# Altium PCB PCB1.PcbDoc
Units mil, origin at the board's own origin, x right, y up, seen from the top; angles counter-clockwise.
Board outline 1545 x 2200 mil, 4 copper layers (Top Layer, GND, 3V3, Bottom Layer), stack 23.756 mil thick; 35 components, 23 nets, 128 pads, 360 vias.
Unrouted connection lines stored in the file: 1.
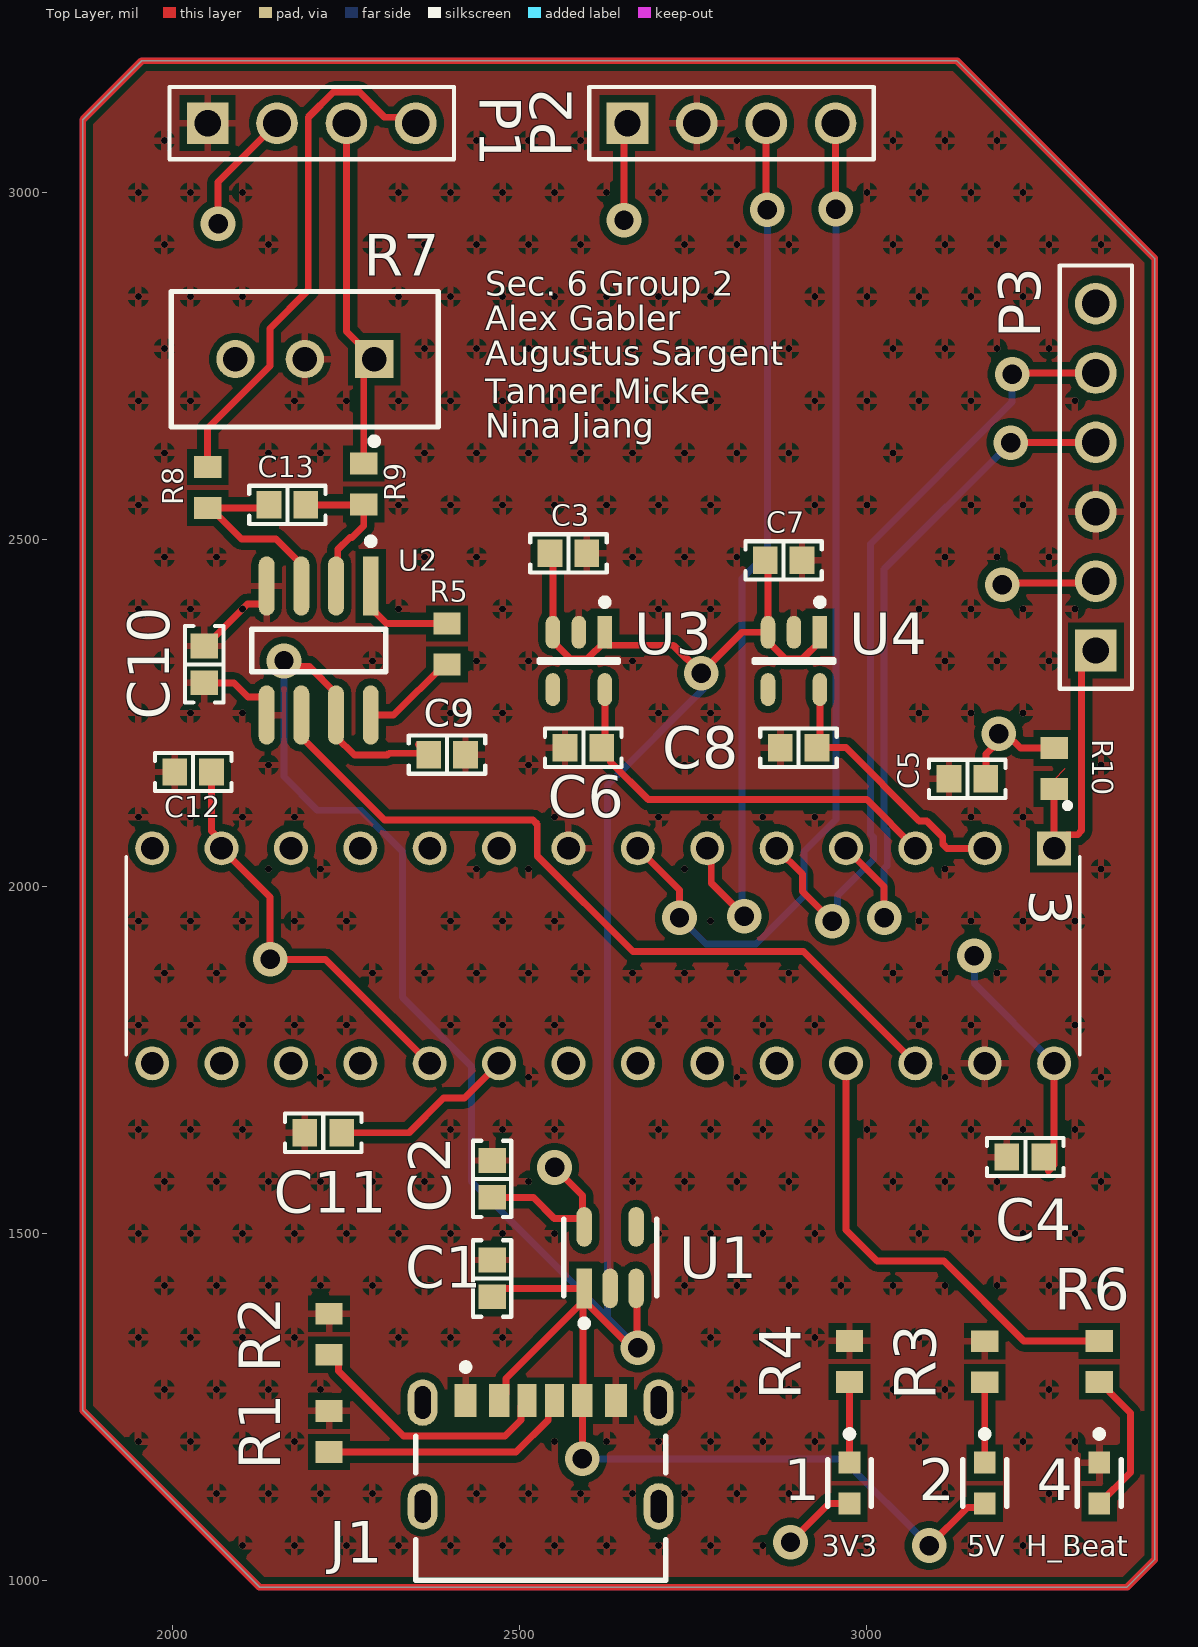
[diagram p0: Top Layer view]
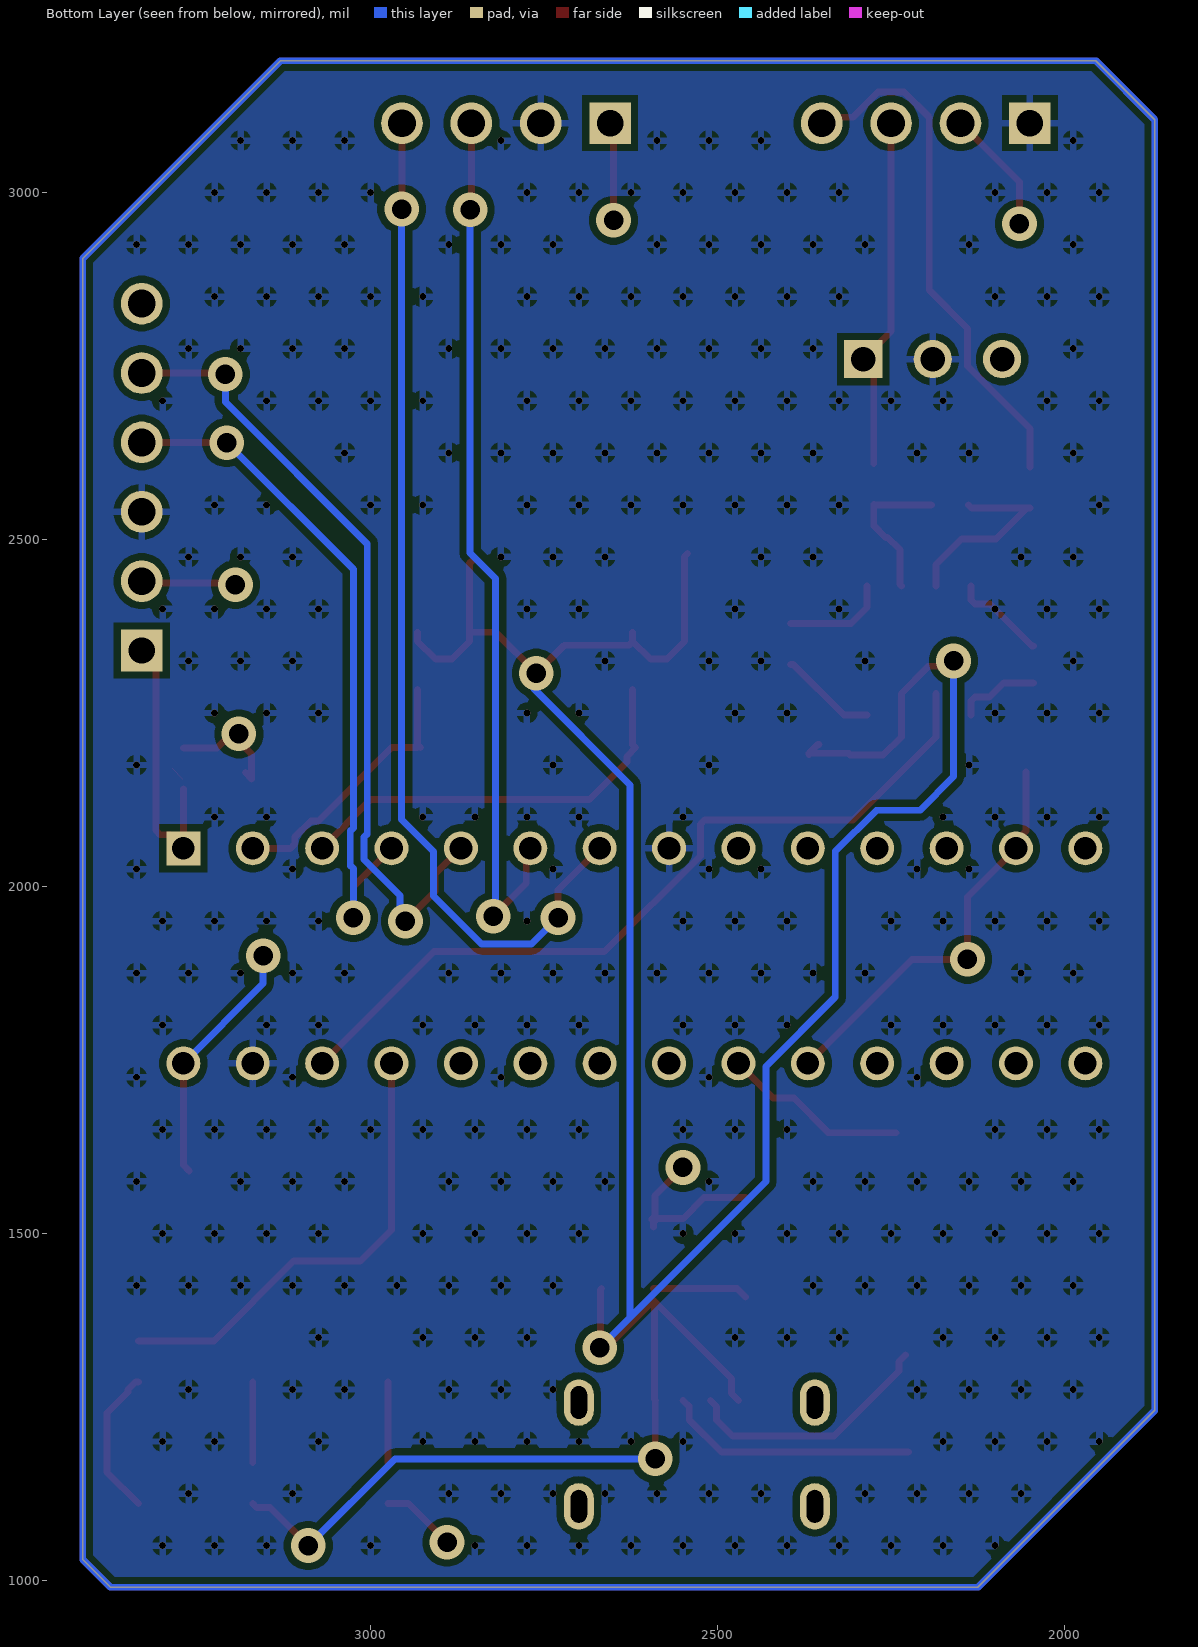
[diagram p1: Bottom Layer view, seen from below]
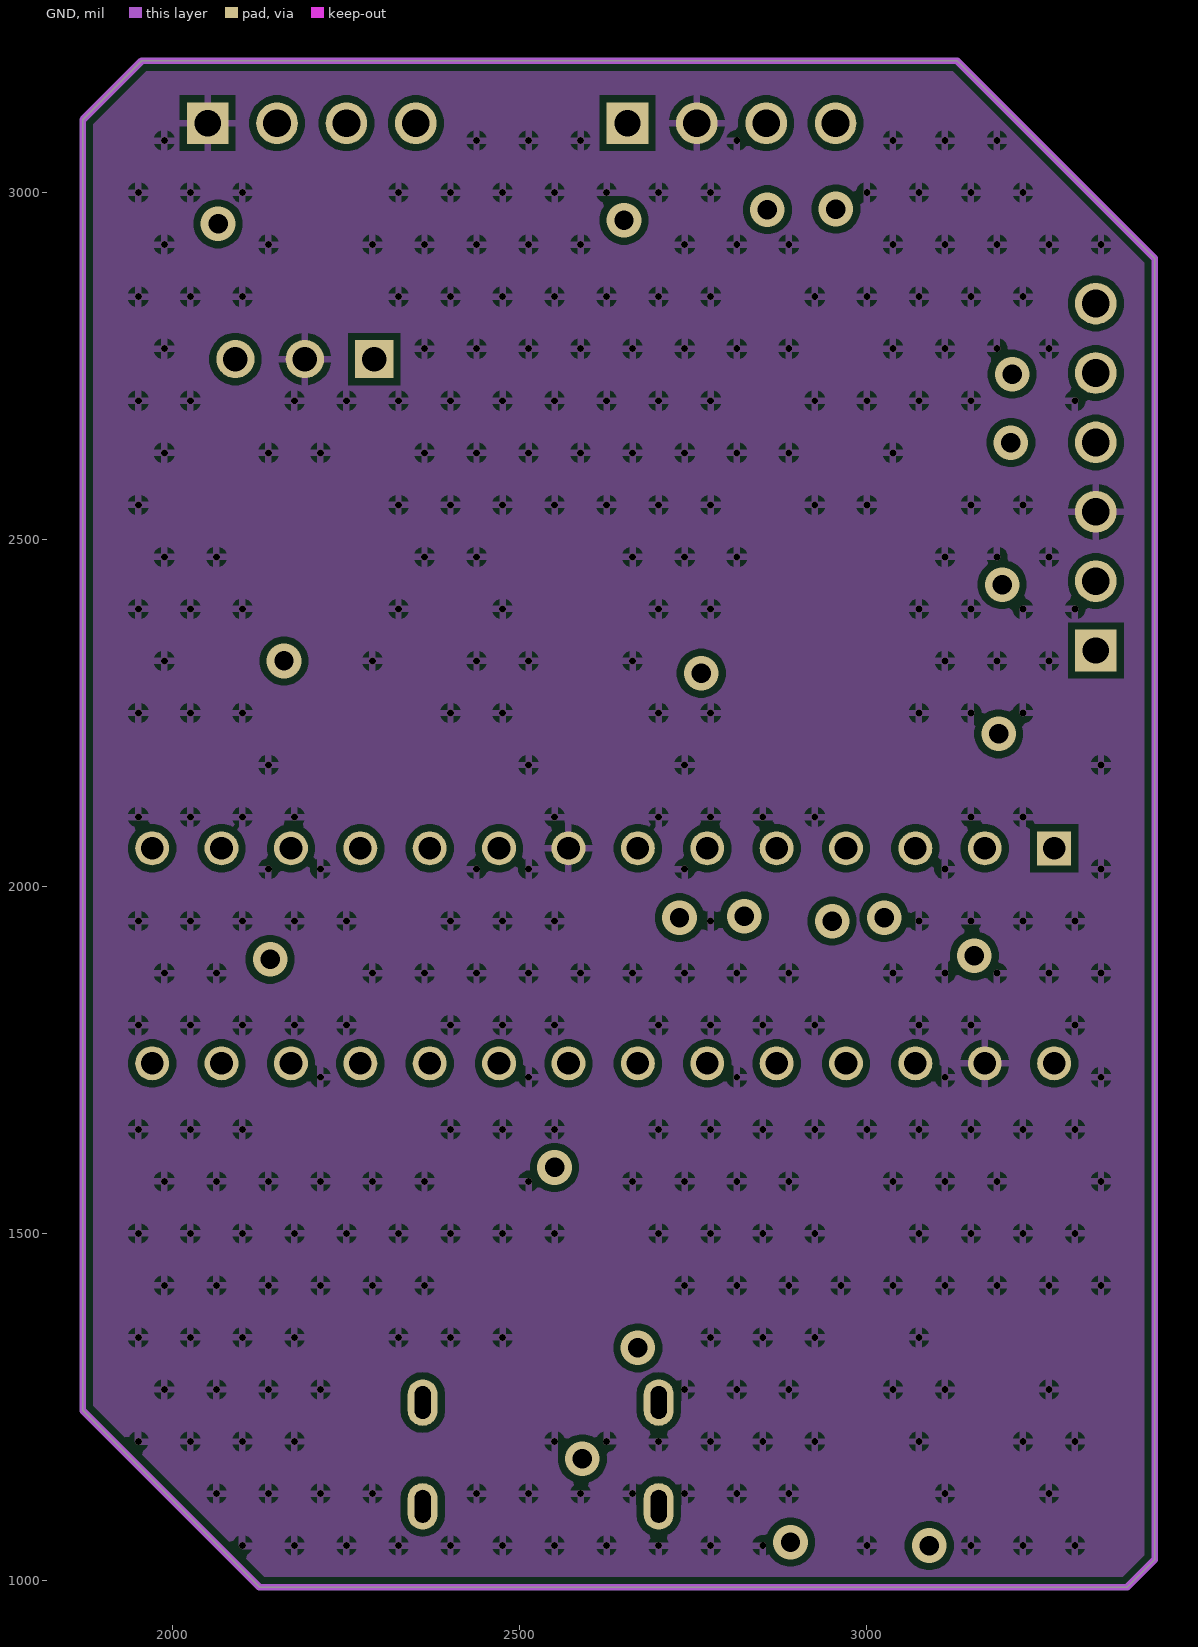
[diagram p2: GND]
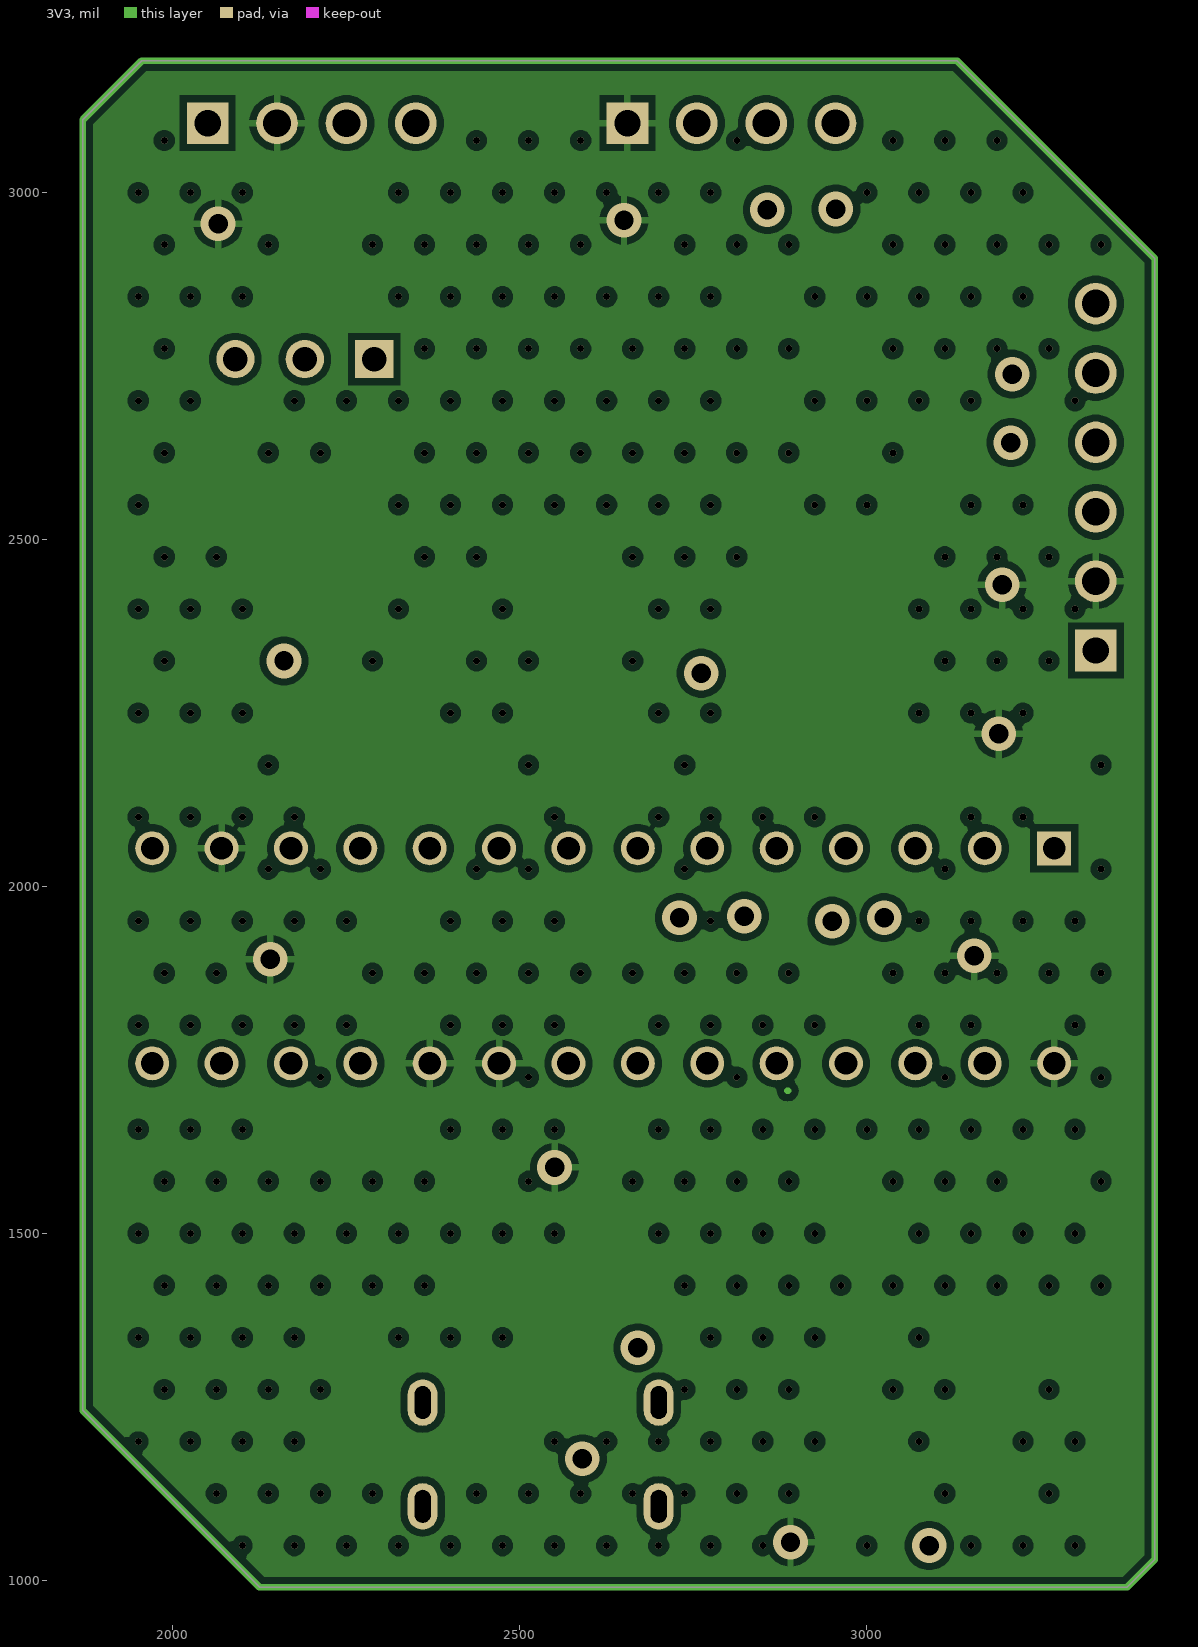
[diagram p3: 3V3]
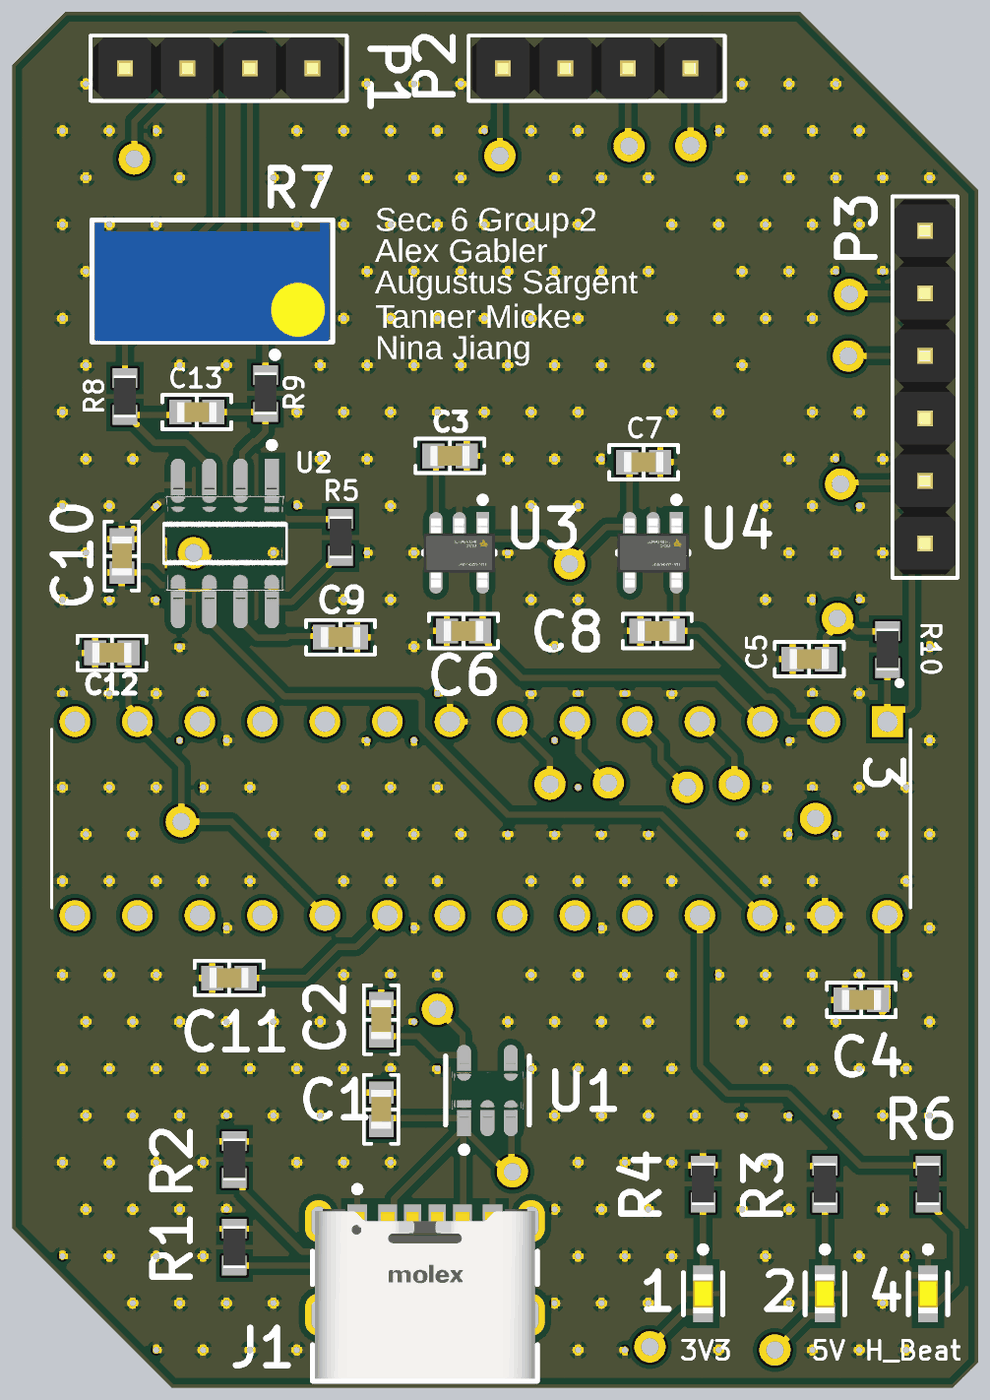
[diagram p4: 3D render of the assembled board from above, using the file's embedded part models]

## Layer stack, top to bottom
Top Solder: solder mask 0.4, Solder Resist, Dk 3.5
Top Layer: signal copper 1.4
Dielectric 2: prepreg 2.8, PP-006, Dk 4.1
GND: signal copper 1.378
Dielectric 1: dielectric 12.6, FR-4, Dk 4.8
3V3: signal copper 1.378
Dielectric 3: prepreg 2.8, PP-006, Dk 4.1
Bottom Layer: signal copper 1.4
Bottom Solder: solder mask 0.4, Solder Resist, Dk 3.5

## Board outline
1870,1245 1870,3105 1955,3190 3130,3190 3415,2905 3415,1030 3375,990 2125,990

## Design rules (kind name [scope] priority, off if disabled: settings)
Clearance "Stitching GND" [IsStitchingVia and InNet('GND') vs (IsVia and (Not IsStitchingVia)) Or IsPad] p1: gap=5 ignorepadtopadclearanceinfootprint=FALSE
Clearance [All] p2: gap=10 ignorepadtopadclearanceinfootprint=FALSE
PolygonConnect [All] p1: connectstyle=Relief reliefconductorwidth=10 reliefentries=4 polygonreliefangle="90 Angle" airgapwidth=10
RoutingVias [All] p1: holewidth=28 width=50 viastyle="Through Hole" minholewidth=28 minwidth=50 maxholewidth=28 maxwidth=50
SolderMaskExpansion [All] p1: expansion=4 istentingtop=FALSE
SupplyNets "Schematic Supply Nets_4" [InNet('1V_Out')] p1: voltage=0.000
SupplyNets "Schematic Supply Nets_3" [InNet('3V3_Out')] p2: voltage=0.000
SupplyNets "Schematic Supply Nets_2" [InNet('5V_Connector')] p3: voltage=0.000
SupplyNets "Schematic Supply Nets_1" [InNet('2V_Out')] p4: voltage=0.000
SupplyNets "Schematic Supply Nets" [InNet('GND')] p5: voltage=0.000
Width [All] p1: maxlimit=10 minlimit=10 preferedwidth=10
30 further rules are at their usual default settings.

## Classes and differential pairs
component class U_Power: 1 2 C1 C2 C3 C6 C7 C8 J1 R1 R2 R3 R4 U1 U3 U4
component class U_Main: 3 4 C4 C5 C9 C10 C11 C12 C13 P1 P2 P3 R5 R6 R7 R8 R9 R10 U2

## Components (designator, comment, footprint, x,y, rotation, side; value= is the part's Value field where it differs from the comment)
1 "GREEN" FP-ASMT-RF45-AN002-MFG 2975,1140 r270 top
2 "GREEN" FP-ASMT-RF45-AN002-MFG 3170,1140 r270 top
3 "PIC24FJ64GA002-I/SP" DIP787W46P254L3467H508Q28 2620,1900 r270 top
4 "GREEN" FP-ASMT-RF45-AN002-MFG 3335,1140 r270 top
C1 "" "CAP 0603_1608" 2460,1435 r90 top value=1u
C2 "" "CAP 0603_1608" 2460,1578.43 r90 top value=1u
C3 "" "CAP 0603_1608" 2570,2480 r0 top value=1u
C4 "" "CAP 0603_1608" 3228.43,1610 r0 top value=1u
C5 "" "CAP 0603_1608" 3145,2155 r0 top value=1u
C6 "" "CAP 0603_1608" 2591.57,2200 r180 top value=1u
C7 "" "CAP 0603_1608" 2880,2470 r0 top value=1u
C8 "" "CAP 0603_1608" 2901.57,2200 r180 top value=1u
C9 "" "CAP 0603_1608" 2395,2190 r180 top value=1u
C10 "" "CAP 0603_1608" 2045,2320 r90 top value=1u
C11 "" "CAP 0603_1608" 2216.57,1645 r0 top value=1u
C12 "" "CAP 0603_1608" 2029.01,2164.92 r0 top value=1u
C13 "" "CAP 0603_1608" 2165,2550 r180 top value=2u2
J1 "217175-0001" FP-217175-0001-MFG 2530,1140 r0 top
P1 "1x4 Header" "1x4 Header" 2050,3100 r0 top
P2 "1x4 Header" "1x4 Header" 2655,3100 r0 top
P3 "1x6 Header" "1x6 Header" 3330,2340 r90 top
R1 "5.1k" RESC1608X55X25ML10T15 2225,1214.53 r90 top value="10 kOhms"
R2 "5.1k" RESC1608X55X25ML10T15 2225,1354.53 r90 top value="10 kOhms"
R3 "510" RESC1608X55X25ML10T15 3170,1315 r90 top value="10 kOhms"
R4 "261" RESC1608X55X25ML10T15 2975,1315.47 r90 top value="10 kOhms"
R5 "510" RESC1608X55X25ML10T15 2395,2349.53 r270 top value="10 kOhms"
R6 "220" RESC1608X55X25ML10T15 3335,1315.47 r270 top value="10 kOhms"
R7 "PV36W501C01B00" FP-PV36W-MFG 2190,2759.8 r90 top
R8 "30k" RESC1608X55X25ML10T15 2050,2575 r90 top value="10 kOhms"
R9 "30k" RESC1608X55X25ML10T15 2275,2580 r90 top value="10 kOhms"
R10 "10k" RESC1608X55X25ML10T15 3270,2170 r90 top value="10 kOhms"
U1 "MIC5504-3.3YM5-TR" FP-SOT23-5LD-PL-1-IPC_B 2630,1465 r90 top
U2 "INA828IDR" FP-D0008A-IPC_B 2210,2340 r270 top
U3 "TLV7743PDBVR" FP-DBV0005A-IPC_C 2585,2325 r270 top
U4 "TLV70220PDBVR" FP-DBV0005A-IPC_C 2895,2325 r270 top

## Footprints (in the part's own frame and the unit in brackets; to place one, negate y for a bottom-side part, rotate by r counter-clockwise, add the part's x,y. Pads: shape width x height; smd on the part's side, far side on the other; paste and mask are expansions set on the pad)
"1x4 Header" [mil]
  rect 60x60 hole 38 mask+0: 1(0,0)
  round 60 hole 40 mask+0: 2(100,0) 3(200,0) 4(300,0)
  silkscreen extent -55,-52 355,52, body extent -50,-49 350,49, height 415
"1x6 Header" [mil]
  rect 60x60 hole 38 mask+0: 1(0,0)
  round 60 hole 40 mask+0: 2(100,0) 3(200,0) 4(300,0) 5(400,0) 6(500,0)
  silkscreen extent -55,-52 555,52, body extent -50,-49 550,49, height 415
"CAP 0603_1608" [mm] "Chip Capacitor, 2-Leads, Body 1.60x0.80mm, IPC Medium Density"
  rect 0.9x1 smd: 1(-0.675,0) 2(0.675,0)
  silkscreen extent -1.4,-0.7 1.4,0.7, body extent -0.8,-0.41 0.8,0.41, height 0.82
DIP787W46P254L3467H508Q28 [mil]
  rect 48.94x48.94 hole 32.68: 1(-155,650)
  round 48.94 hole 32.68: 2(-155,550) 3(-155,450) 4(-155,350) 5(-155,250) 6(-155,150) 7(-155,50) 8(-155,-50) 9(-155,-150) 10(-155,-250) 11(-155,-350) 12(-155,-450) 13(-155,-550) 14(-155,-650) 15(155,-650) 16(155,-550) 17(155,-450) 18(155,-350) 19(155,-250) 20(155,-150) 21(155,-50) 22(155,50) 23(155,150) 24(155,250) 25(155,350) 26(155,450) 27(155,550) 28(155,650)
  silkscreen extent -220,-687 143,687
FP-217175-0001-MFG [mm]
  rrect100% 1.1x1.7 hole 1.2 slot 0.6 at 0 deg paste-2539.97 mask+0: 1(-4.32,2.95) 2(4.32,2.95) 3(-4.32,-0.85) 4(4.32,-0.85)
  rect 0.7x1.2 smd paste+0 mask+0: A5(-0.5,3.03) B5(0.5,3.03)
  rect 0.76x1.2 smd paste+0 mask+0: A9(1.52,3.03) B9(-1.52,3.03)
  rect 0.8x1.2 smd paste+0 mask+0: A12(2.75,3.03) B12(-2.75,3.03)
  silkscreen extent -4.57,-3.55 4.57,4.37, body extent -4.97,-3.65 4.97,3.9, height 0.25
FP-ASMT-RF45-AN002-MFG [mm]
  rect 0.8x0.8 smd paste+0 mask+0: 1(-0.75,0) 2(0.75,0)
  silkscreen extent -1.92,-0.8 0.85,0.8, body extent -1.25,-0.55 1.25,0.55, height 0.25
FP-D0008A-IPC_B [mil]
  rect 85.4x22.92 smd paste+0 mask+0: 1(-93.06,75)
  rrect100% 85.4x22.92 smd paste+0 mask+0: 2(-93.06,25) 3(-93.06,-25) 4(-93.06,-75) 5(93.06,-75) 6(93.06,-25) 7(93.06,25) 8(93.06,75)
  silkscreen extent -162,-97 31,97, body extent -146,-106 146,106, height 10
FP-DBV0005A-IPC_C [mm]
  rect 1.205x0.532 smd paste+0 mask+0: 1(-1.05,0.95)
  rrect100% 1.205x0.532 smd paste+0 mask+0: 2(-1.05,0) 3(-1.05,-0.95) 4(1.05,-0.95) 5(1.05,0.95)
  silkscreen extent -2.28,-1.45 0.05,1.45, body extent -1.75,-1.55 1.75,1.55, height 0.25
FP-PV36W-MFG [mm]
  rect 1.4x1.4 hole 0.9 paste-2539.97 mask+0: 1(0.005,-2.54)
  round 1.4 hole 0.9 paste-2539.97 mask+0: 2(0.005,0) 3(0.005,2.54)
  silkscreen extent -3.12,-4.89 2.48,4.89, body extent -2.58,-4.99 2.58,4.99, height 0.25
FP-SOT23-5LD-PL-1-IPC_B [mm]
  rect 1.456x0.57 smd paste+0 mask+0: 1(-1.125,0.95)
  rrect100% 1.456x0.57 smd paste+0 mask+0: 2(-1.125,0) 3(-1.125,-0.95) 4(1.125,-0.95) 5(1.125,0.95)
  silkscreen extent -2.53,-1.7 1.4,1.7, body extent -2.1,-1.7 2.1,1.7, height 0.25
RESC1608X55X25ML10T15 [mm] "Chip Resistor, 2-Leads, Body 1.70x0.90mm, IPC Low Density"
  rect 0.8x1 smd: 1(-0.75,0) 2(0.75,0)
  body extent -0.85,-0.45 0.85,0.45, height 0.55

## Part data
1 2 4: library part CMP-2000-05796-2, "ASMT-RF45-AN002 LED YLW/GREEN DIFFUSED 0603 SMD", Colour="Yellow Green", Forward Current=20mA, Forward Voltage=2V, manufacturer=Broadcom, Manufacturer Part Number=ASMT-RF45-AN002, Max Junction Temp=+110°C, Power Dissipation=48mW, Reverse Voltage=5V, Temperature="-40°C to +100°C", Temperature Range High=+100°C, Temperature Range Low=-40°C, Automotive=No, Category=Diode, ComponentLink2Description=Datasheet, ComponentLink2URL=https://docs.broadcom.com/docs/AV02-0378EN, Device Class L1=Optoelectronics, Device Class L2=LEDs, Device Class L3=unset, Digikey Description="LED YLW/GREEN DIFFUSED 0603 SMD", Height=0.55mm, Lead Free=Yes, Led Orientation="Top View", Luminous Intensity=60mcd, Mouser Description="LED; SMD; 0603; yellow green; 28-60mcd; 1.6x0.8x0.45mm; 145°; 20mA", Octopart=https://octopart.com/asmt-rf45-an002-broadcom-71127304, Package=ASMT-RF45-AN002, Peak Emmision Wavelength=574nm, RoHS=TRUE, Viewing Angle=145°, Wavelength=573nm
3: library part CMP-031-00017-2, "PIC PICÂ® 24F Microcontroller IC 16-Bit 32MHz 64KB _22K x 24_ FLASH 28-SPDIP", Case/Package="SPDIP-28 Microchip", Availability=Unavailable, Component Type=Standard, Design Item ID=PIC24FJ64GA002-I/SP, MF=Microchip, MP=PIC24FJ64GA002-I/SP, Pins=28, price=None, SnapEDA_Link=https://www.snapeda.com/parts/PIC24FJ64GA002-I/SP/Microchip/view-part/262458/?ref=snap, Source=SnapEDAsch.SchLib
C1 C2 C3 C4 C5 C6 C7 C8 C9 C10 C11 C12 C13: library part CMP-184-001772-1, Capacitance="4.7 µF", Device Package="0603 (1608 Metric)", manufacturer="Murata Electronics", Operating Temperature="-55°C ~ 85°C", Part Number=ZRB18AR6YA475ME05L, Temperature Coefficient=X5R, Tolerance=±20%, Voltage - Rated=35V, Applications="Acoustic Noise Reduction", ComponentLink1Description=Datasheet, ComponentLink1URL=https://search.murata.co.jp/Ceramy/image/img/A01X/G101/ENG/ZRB18AR6YA475ME05-01.pdf, ComponentLink2Description="DigiKey Link", ComponentLink2URL=https://www.digikey.com/en/products/detail/murata-electronics/ZRB18AR6YA475ME05L/7595507, Features="Interposer Termination", lastupdated="9/19/2022 1:00:59 PM", Lifecycle Status=Active, Minimum Order=1, Mounting Type="Surface Mount, MLCC", Package / Case="0603 (1608 Metric)", packaging=TapeAndReel, Part Status=Active, partid=9721, price=0.10, series=ZRB, Size / Dimension="0.063\" L x 0.031\" W (1.60mm x 0.80mm)", Thickness (Max)="0.047\" (1.20mm)"
J1: library part CMP-002-00112-1, "Conn USB 2.0 Type C F 6 POS 1.23mm/1.02mm/1mm Solder RA SMD 6 Terminal 1 Port"
P1 P2: library part CMP-006-000008-2, "Male Header, Dupont, 1x4", Design Item ID="1x4 Header", Source="1x4 Header.SchLib"
P3: library part CMP-010-000000-2, "Male Header, Dupont, 1x6", Design Item ID="1x6 Header", Source="1x6 Header.SchLib"
R1 R2 R3 R4 R5 R6 R8 R9 R10: library part CMP-009-00014-4, "Chip Resistor, +/-1%, 0.1 W, -55 to 155 degC, 0603 (1608 Metric)", Case/Package=0603, Max Operating Temperature=155°C, Min Operating Temperature=-55°C, Power=100mW, Tolerance=1%, Voltage Rating=50V, Mounting Technology=SM, Pins=2, RoHS Compliant=True
R7: library part CMP-009-00201-1, "Trimmer", RoHS Compliant=Yes
U1: library part CMP-008-00006-1, "Fixed Positive LDO Regulator, 3.3V, 0.38V Dropout, CMOS, PDSO5", RoHS Compliant=Yes
U2: library part CMP-00026-1, "Instrumentation Amplifier, 1 Func, 90uV Offset-Max, 2MHz Band Width, PDSO8"
U3 U4: library part CMP-019-00061-1, "Fixed Positive LDO Regulator, 2V, CMOS, PDSO5", Case/Package=LSSOP, Max Supply Voltage=5.5V, Pins=5, RoHS Compliant=Yes

## Via types
v1: diameter 10, hole 10, Top Layer to Bottom Layer, 339 vias
v2: diameter 50, hole 28, Top Layer to Bottom Layer, 21 vias

## Nets (pads, with @x,y where several pads share a name; then routed paths per layer and width w, separated by ;. In a path a pad name is that pad's centre, name@x,y a point inside that pad or via, vN(x,y) a via of type N, cw(c..) or ccw(c..) an arc to the next point about the centre after c; other vN are vias at no path point)
1V_Out: 3.3 C6.1 U3.5 | length 602.1
  Top Layer w10: U3.5 2622.4,2204.25 C6.1 2630.87,2187.28 2630.87,2179.13 2685,2125 3000,2125 3.3
2V_Out: 3.2 C8.1 U4.5 | length 389.2
  Top Layer w10: C8.1 2932.4,2204.25 U4.5 ; C8.1@2932.4,2200 2970,2200 3075.53,2094.47 3086.35,2094.47 3109.47,2071.35 3109.47,2060.86 3115.33,2055 3.2
3V3_Out: 1.2 3.13 3.19 3.20 3.28 C2.1 C4.2 C5.2 C11.2 C12.2 P1.2 P2.1 P3.2 R10.2 U1.5 | length 2221.6
  Top Layer w10: C12.2 2055.58,2079.95 2070,2065.54 3.13 2140,1985 v2(2140,1895) 2220,1895 3.19 3.19@2370,1739.67 ; v2(2065,2955) 2065,3015 P1.2 ; C11.2 2340,1645 2390,1695 2420,1695 3.20 ; C2.1 2519.4,1551.85 2549.51,1521.74 2586.86,1521.74 2592.6,1516 U1.5 ; v2(2550,1595) 2590.22,1554.78 2590.22,1524.76 U1.5@2594.98,1520 ; v2(2650,2960) 2650,3095 P2.1 ; v2(2890,1055) 2945.47,1110.47 1.2 ; C5.2@3180.63,2164.06 C5.2 3171.57,2190.75 3190,2209.18 v2(3190,2220) 3200.82,2220 3221.3,2199.53 R10.2 ; v2(3195,2435) 3197.5,2437.5 3327.5,2437.5 P3.2 ; 3261.57,1590 3270,1598.43 3.28
  3V3 w10: 2885.53,1705.53 2886.35,1705.53
  Bottom Layer w10: v2(3155,1900) 3155,1860 3.28
5V_Connector: 2.2 C1.1 C3.1 C7.1 C9.2 J1.A9 J1.B9 U1.1 U1.3 U2.7 U3.1 U3.3 U4.1 U4.3 | length 4701.2
  Top Layer w10: v2(2160,2325) 2167.65,2317.35 2195.84,2317.35 2235,2278.19 U2.7 2235,2215.7 2261.46,2189.24 2308.97,2189.24 2311.69,2191.97 C9.2@2368.43,2191.97 ; C9.2@2353.74,2204.69 2355.71,2204.69 C9.2@2368.43,2191.97 ; C9.2 C9.2@2368.43,2191.97 ; C1.1 2472.27,1420.7 U1.1 ; J1.B9 2480.12,1269.25 2480.12,1290.78 2591.22,1401.88 2591.22,1260.67 J1.A9 2589.92,1259.21 2589.92,1175.08 v2(2590,1175) ; C3.1 2547.6,2475.83 U3.3 2547.6,2353.11 2573.07,2327.63 2596.93,2327.63 U3.1@2622.4,2353.11 ; U1.1@2592.6,1403.26 2660.86,1335 v2(2670,1335) 2668.7,1336.3 2668.7,1419.4 U1.3 ; U3.1 U3.1@2622.4,2353.11 ; C7.1 2857.6,2465.83 U4.3 ; U4.1 2932.4,2353.11 2906.93,2327.63 2883.07,2327.63 2857.6,2353.11 U4.3 ; v2(3090,1050) 3145.11,1105.11 3164.64,1105.11 2.2 ; U3.1@2622.4,2353.11 2627.88,2347.63 2721.04,2347.63 v2(2761.36,2307.31) 2820.41,2366.36 U4.3
  Bottom Layer w10: v2(2160,2325) 2160,2158.26 2208.49,2109.77 2271.04,2109.77 2330.53,2050.29 2330.53,1840.29 2430.53,1740.29 2430.53,1574.47 2626.38,1378.62 ; v2(2590,1175) 2965,1175 v2(3090,1050) ; v2(2670,1335) 2626.38,1378.62 ; v2(2761.36,2307.31) 2761.36,2288.64 2765,2285 2626.38,2146.38 2626.38,1378.62
GND: 3.8 3.27 4.1 C1.2 C2.2 C3.2 C4.1 C5.1 C6.2 C7.2 C8.2 C9.1 C10.1 C10.2 C11.1 C12.1 J1.A12 J1.B12 P1.1 P2.2 P3.3 R1.2 R2.2 R3.2 R4.2 R7.2 U1.2 U2.4 U2.5 U3.2 U4.2 | length 258.8
  Top Layer w10: C10.1 2087.97,2293.43 2108.21,2273.19 2129.03,2273.19 2135,2267.22 U2.5 ; C10.2 2046.97,2346.57 2107.21,2406.81 2129.03,2406.81 2135,2412.78 U2.4
  other v1: 2100,1050 2175,1050 2250,1050 2325,1050 2400,1050 2475,1050 2550,1050 2625,1050 2700,1050 2775,1050 2850,1050 3000,1050 3150,1050 3225,1050 3300,1050 2062.5,1125 2137.5,1125 2212.5,1125 2287.5,1125 2437.5,1125 2512.5,1125 2587.5,1125 2662.5,1125 2737.5,1125 2812.5,1125 2887.5,1125 3112.5,1125 3262.5,1125 1950,1200 2025,1200 2100,1200 2175,1200 2550,1200 2625,1200 2700,1200 2775,1200 2850,1200 2925,1200 3075,1200 3225,1200 3300,1200 1987.5,1275 2062.5,1275 2137.5,1275 2212.5,1275 2737.5,1275 2812.5,1275 2887.5,1275 3037.5,1275 3112.5,1275 3262.5,1275 1950,1350 2025,1350 2100,1350 2175,1350 2325,1350 2400,1350 2475,1350 2775,1350 2850,1350 2925,1350 3075,1350 1987.5,1425 2062.5,1425 2137.5,1425 2212.5,1425 2287.5,1425 2362.5,1425 2737.5,1425 2812.5,1425 2887.5,1425 2962.5,1425 3037.5,1425 3112.5,1425 3187.5,1425 3262.5,1425 3337.5,1425 1950,1500 2025,1500 2100,1500 2175,1500 2250,1500 2325,1500 2400,1500 2475,1500 2550,1500 2700,1500 2775,1500 2850,1500 2925,1500 3075,1500 3150,1500 3225,1500 3300,1500 1987.5,1575 2062.5,1575 2137.5,1575 2212.5,1575 2287.5,1575 2362.5,1575 2512.5,1575 2662.5,1575 2737.5,1575 2812.5,1575 2887.5,1575 3037.5,1575 3112.5,1575 3187.5,1575 3337.5,1575 1950,1650 2025,1650 2100,1650 2400,1650 2475,1650 2550,1650 2700,1650 2775,1650 2850,1650 2925,1650 3000,1650 3075,1650 3150,1650 3225,1650 3300,1650 2212.5,1725 2512.5,1725 2812.5,1725 3112.5,1725 3337.5,1725 1950,1800 2025,1800 2100,1800 2175,1800 2250,1800 2400,1800 2475,1800 2550,1800 2700,1800 2775,1800 2850,1800 2925,1800 3075,1800 3150,1800 3300,1800 1987.5,1875 2062.5,1875 2287.5,1875 2362.5,1875 2437.5,1875 2512.5,1875 2587.5,1875 2662.5,1875 2737.5,1875 2812.5,1875 2887.5,1875 3037.5,1875 3112.5,1875 3187.5,1875 3262.5,1875 3337.5,1875 1950,1950 2025,1950 2100,1950 2175,1950 2250,1950 2400,1950 2475,1950 2550,1950 2775,1950 3075,1950 3150,1950 3225,1950 3300,1950 2137.5,2025 2212.5,2025 2437.5,2025 2512.5,2025 2737.5,2025 3112.5,2025 3337.5,2025 1950,2100 2025,2100 2100,2100 2175,2100 2550,2100 2700,2100 2775,2100 2850,2100 2925,2100 3150,2100 3225,2100 2137.5,2175 2512.5,2175 2737.5,2175 3337.5,2175 1950,2250 2025,2250 2100,2250 2400,2250 2475,2250 2700,2250 2775,2250 3075,2250 3150,2250 3225,2250 1987.5,2325 2287.5,2325 2437.5,2325 2512.5,2325 2662.5,2325 3112.5,2325 3187.5,2325 3262.5,2325 1950,2400 2025,2400 2100,2400 2325,2400 2475,2400 2700,2400 2775,2400 3075,2400 3150,2400 3225,2400 3300,2400 1987.5,2475 2062.5,2475 2362.5,2475 2437.5,2475 2662.5,2475 2737.5,2475 2812.5,2475 3112.5,2475 3187.5,2475 3262.5,2475 1950,2550 2325,2550 2400,2550 2475,2550 2550,2550 2625,2550 2700,2550 2775,2550 2925,2550 3000,2550 3150,2550 3225,2550 1987.5,2625 2137.5,2625 2212.5,2625 2362.5,2625 2437.5,2625 2512.5,2625 2587.5,2625 2662.5,2625 2737.5,2625 2812.5,2625 2887.5,2625 3037.5,2625 1950,2700 2025,2700 2175,2700 2250,2700 2325,2700 2400,2700 2475,2700 2550,2700 2625,2700 2700,2700 2775,2700 2925,2700 3000,2700 3075,2700 3150,2700 3300,2700 1987.5,2775 2362.5,2775 2437.5,2775 2512.5,2775 2587.5,2775 2662.5,2775 2737.5,2775 2812.5,2775 2887.5,2775 3037.5,2775 3112.5,2775 3187.5,2775 3262.5,2775 1950,2850 2025,2850 2100,2850 2325,2850 2400,2850 2475,2850 2550,2850 2625,2850 2700,2850 2775,2850 2925,2850 3000,2850 3075,2850 3150,2850 3225,2850 1987.5,2925 2137.5,2925 2287.5,2925 2362.5,2925 2437.5,2925 2512.5,2925 2587.5,2925 2737.5,2925 2812.5,2925 2887.5,2925 3037.5,2925 3112.5,2925 3187.5,2925 3262.5,2925 3337.5,2925 1950,3000 2025,3000 2100,3000 2325,3000 2400,3000 2475,3000 2550,3000 2625,3000 2700,3000 2775,3000 3000,3000 3075,3000 3150,3000 3225,3000 1987.5,3075 2437.5,3075 2512.5,3075 2587.5,3075 2812.5,3075 3037.5,3075 3112.5,3075 3187.5,3075
Net1_1: 1.1 R4.1 | length 116.4
  Top Layer w10: 1.1 R4.1
Net2_1: 2.1 R3.1 | length 115.9
  Top Layer w10: 2.1 R3.1
Net3_1: 3.1 P3.1 R10.1 | length 426.3
  Top Layer w0: R10.1@3270,2153.94 3286.06,2170
  Top Layer w10: R10.1 3.1 3289.47,2074.47 3303.61,2074.47 3309.47,2080.33 3309.47,2319.47 P3.1
Net3_4: 3.4 P3.4 | length 1009.4
  Top Layer w10: 3.4 3025,2000 v2(3025,1955) ; v2(3207.53,2639.68) 3207.85,2640 P3.4
  Bottom Layer w10: v2(3025,1955) 3025,2025.9 3029.47,2030.37 3029.47,2079.63 3025,2084.1 3025,2457.15 v2(3207.53,2639.68)
Net3_5: 3.5 P3.5 | length 1158.8
  Top Layer w10: 3.5 2907.19,2017.81 2907.19,1992.81 v2(2950,1950) ; v2(3209.49,2738.28) 3211.22,2740 P3.5
  Bottom Layer w10: v2(2950,1950) 2957.65,1957.65 2957.65,1986.84 3009.47,2038.65 3009.47,2071.35 3005,2075.82 3005,2493.72 3209.49,2698.21 v2(3209.49,2738.28)
Net3_6: 3.6 P2.3 | length 1280.8
  Top Layer w10: 3.6 2775.8,2049.2 2775.8,2004.71 v2(2823.49,1957.01) ; P2.3 2855,2977.04 v2(2856.69,2975.35)
  Bottom Layer w10: v2(2823.49,1957.01) 2822.99,1957.01 2820,1960 2820,2443.92 2856.69,2480.61 v2(2856.69,2975.35)
Net3_7: 3.7 P2.4 | length 1481.6
  Top Layer w10: 3.7 2730,1995 v2(2730,1955) ; P2.4 2955,2976.63 v2(2955.38,2976.25)
  Bottom Layer w10: v2(2730,1955) 2767.99,1917.01 2840.06,1917.01 2909.47,1986.42 2909.47,2050.29 2955.38,2096.2 v2(2955.38,2976.25)
Net3_25: 3.25 R6.1 | length 671.3
  Top Layer w10: 3.25 2970,1505 3015,1460 3111.17,1460 3226.17,1345 R6.1
Net3_26: 3.26 U2.6 | length 1169.1
  Top Layer w10: U2.6@2185,2278.19 U2.6 2185,2215.7 2305.17,2095.53 2519.14,2095.53 2525,2089.67 2525,2044.18 2663.1,1906.08 2908.92,1906.08 3.26
Net4_2: 4.2 R6.2 | length 215.1
  Top Layer w10: 4.2 3380,1155.47 3380,1240.94 3349.69,1271.26 3349.69,1275.2 3338.94,1285.94 R6.2
NetC13_1: C13.1 R9.1 U2.2 | length 219.3
  Top Layer w10: C13.1 2274.53,2550 R9.1 2275,2520 2258.23,2503.23 2255.31,2503.23 2237.47,2485.39 2237.47,2435.53 U2.2
NetC13_2: C13.2 R8.1 U2.3 | length 290.2
  Top Layer w10: C13.2 2133.9,2545.47 R8.1 2053.94,2545.47 2098.66,2500.75 2148.55,2500.75 2185,2464.3 U2.3
NetJ1_A5: J1.A5 R2.1 | length 371
  Top Layer w10: R2.1@2228.94,1325 2238.32,1315.61 2238.32,1301.68 2332.32,1207.68 2478.34,1207.68 2501.54,1230.87 2501.54,1250.51 J1.A5
NetJ1_B5: J1.B5 R1.1 | length 366.7
  Top Layer w10: R1.1 2494.64,1185 2540.91,1231.27 2540.91,1250.51 J1.B5
NetP1_3: P1.3 R7.1 R9.2 | length 513.3
  Top Layer w10: P1.3 2250,2800 R7.1 2275,2745 R9.2
NetP1_4: P1.4 R8.2 | length 752.9
  Top Layer w10: R8.2 2050,2659.81 2140,2749.81 2140,2804.32 2195,2859.32 2195,3108.64 2231.36,3145 2268.64,3145 2305,3108.64 2341.36,3108.64 P1.4
NetR5_1: R5.1 U2.1 | length 150.7
  Top Layer w10: U2.1 2285,2401.81 2307.76,2379.06 R5.1
NetR5_2: R5.2 U2.8 | length 140.3
  Top Layer w10: U2.8 2318.01,2246.94 2391.06,2320 R5.2
pads on no net: 3.9 3.10 3.11 3.12 3.14 3.15 3.16 3.17 3.18 3.21 3.22 3.23 3.24 J1.1 J1.2 J1.3 J1.4 P3.6 R7.3 U1.4 U3.4 U4.4

## Polygon pours and split planes (outlines as drawn)
GND on Top Layer "GND_L01_P001" (solid, pour order 1): 1955,3190 1870,3105 1870,1245 2125,990 3375,990 3415,1030 3415,2905 3130,3190
GND on GND "GND_L02_P002" (solid, pour order 2): 1870,1245 2125,990 3375,990 3415,1030 3415,2905 3130,3190 1955,3190 1870,3105
GND on Bottom Layer "GND_L04_P004" (solid, pour order 4): 1955,3190 1870,3105 1870,1245 2125,990 3375,990 3415,1030 3415,2905 3130,3190
3V3_Out on 3V3 "3V3_OUT_L03_P003" (solid, pour order 3): 1955,3190 1870,3105 1870,1245 2130,985 3370,985 3415,1030 3415,2905 3130,3190

## Other copper
Multi-Layer:
  the board outline again, w10

## Silkscreen, mask and mechanical layers (free items; w line width, h text height)
Top Overlay:
  text "Sec. 6 Group 2" at 2450,2840 h60
  text "Alex Gabler" at 2449.95,2790 h60
  text "Augustus Sargent" at 2449.95,2740 h60
  text "Tanner Micke" at 2450,2685 h60
  text "Nina Jiang" at 2450,2635 h60
  text "3V3" at 2935,1035 h30
  text "5V" at 3145,1035 h30
  text "H_Beat" at 3230,1035 h30